# Altium PCB PCB_led7Seg_2.PcbDoc
Units mm, origin at the board's own origin, x right, y up, seen from the top; angles counter-clockwise.
Board outline 53.34 x 38.1 mm, 2 copper layers (Top Layer, Bottom Layer); 2 components, 10 nets, 20 pads, 0 vias.
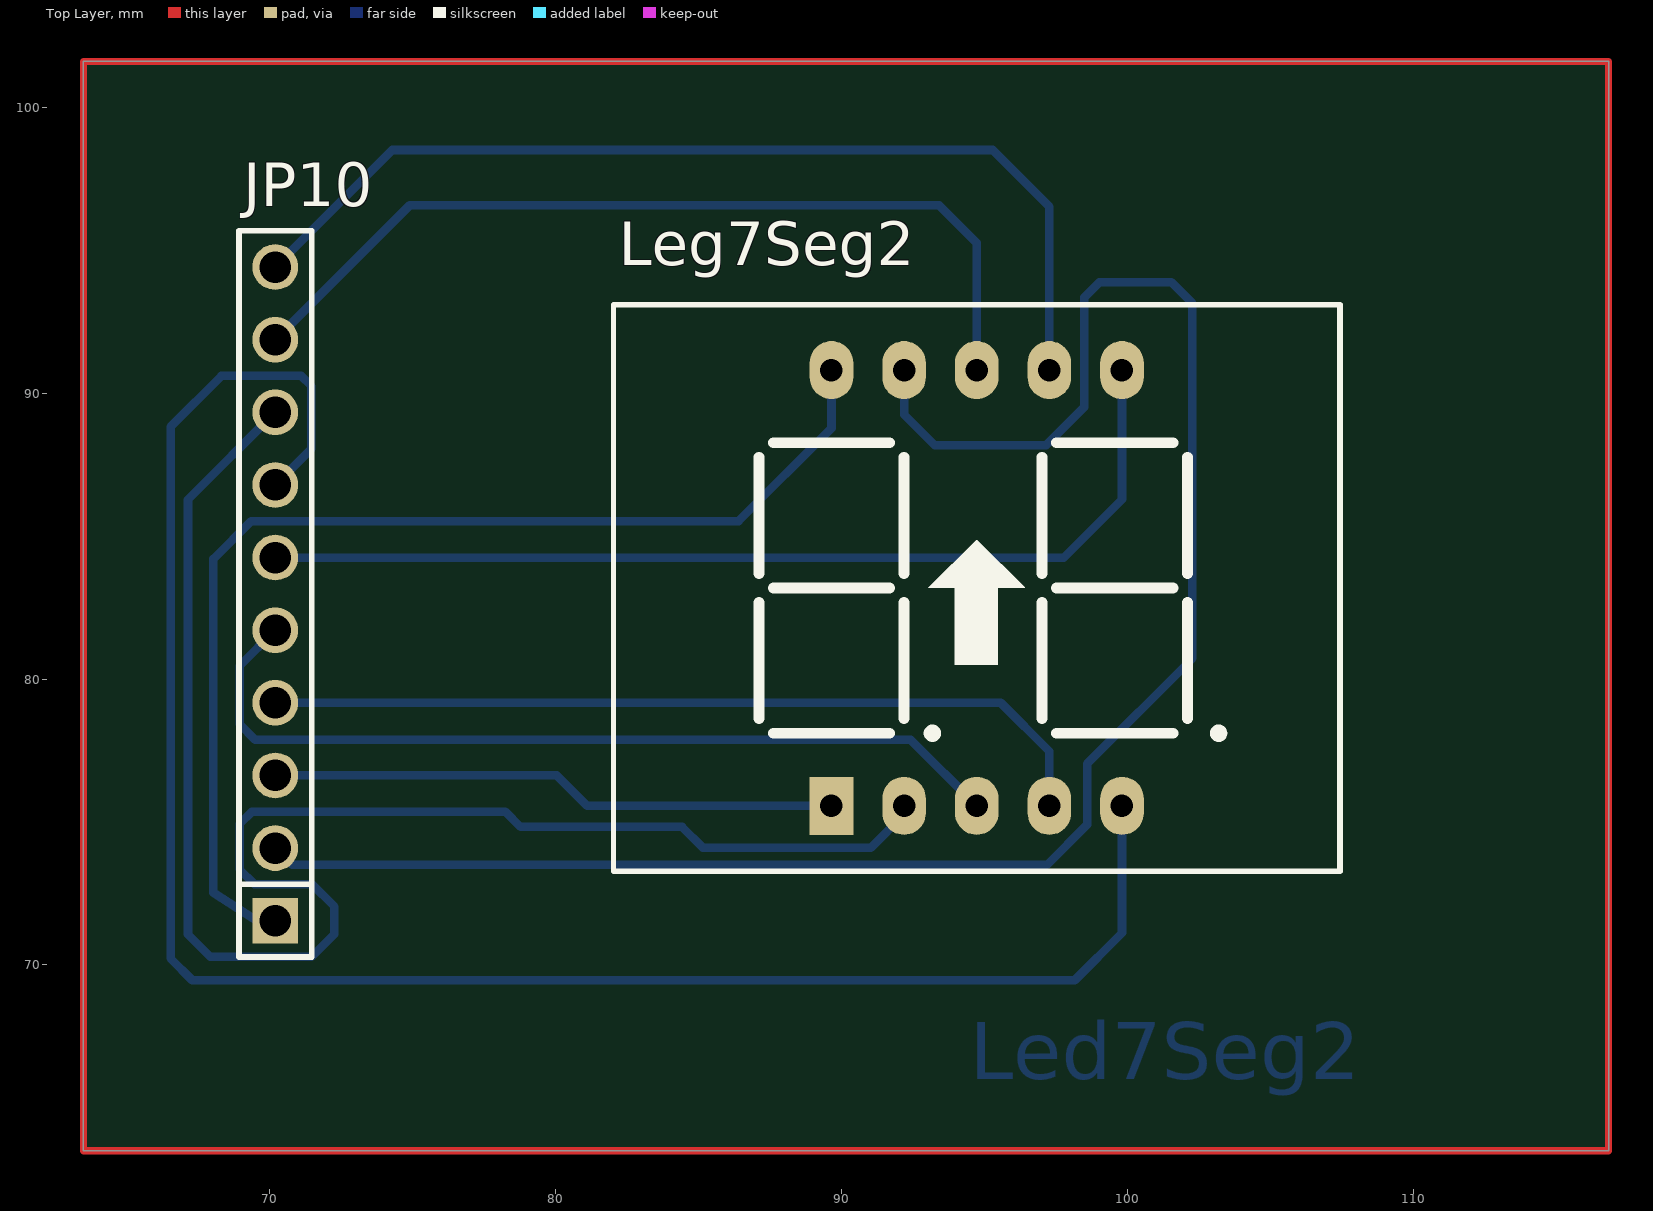
[diagram p0: Top Layer view]
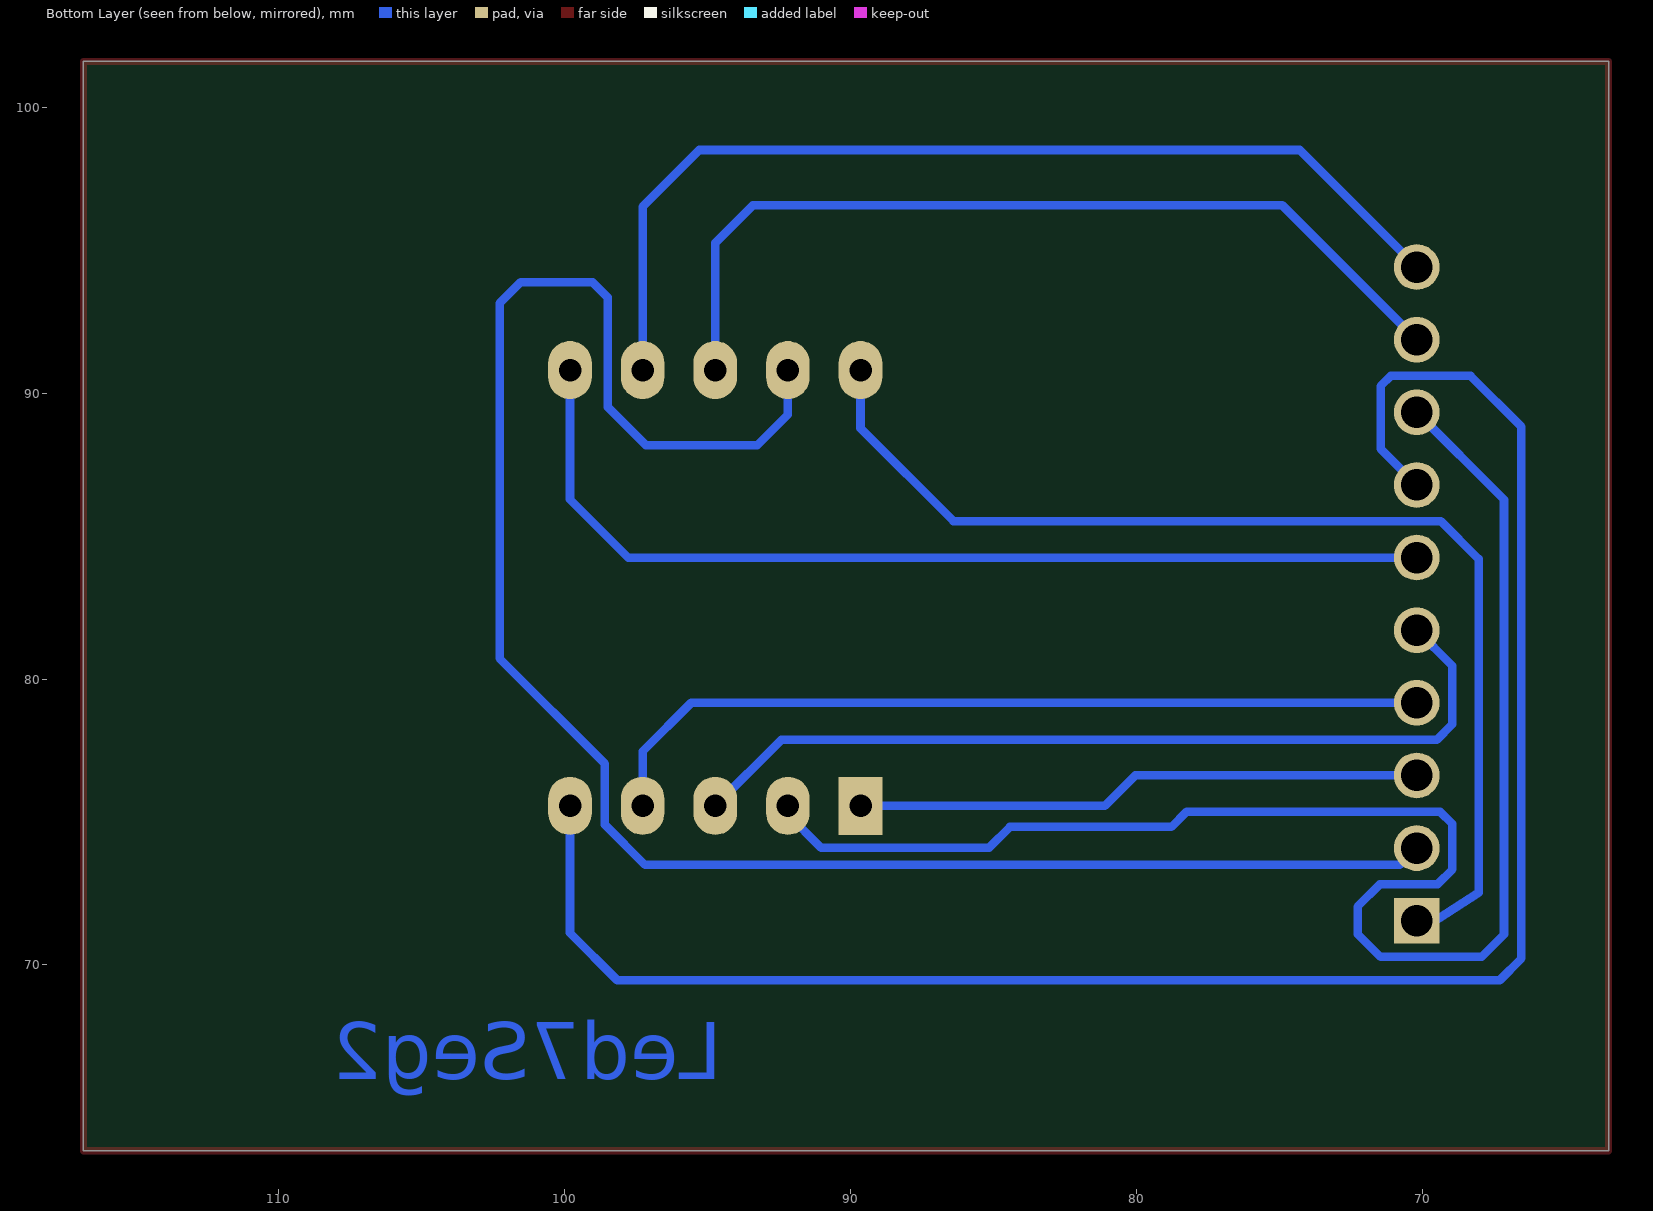
[diagram p1: Bottom Layer view, seen from below]

## Layer stack, top to bottom
Top Solder: solder mask 0.0102, Solder Resist, Dk 3.5
Top Layer: signal copper 0.0356
Dielectric 1: dielectric 0.32, FR-4, Dk 4.8
Bottom Layer: signal copper 0.0356
Bottom Solder: solder mask 0.0102, Solder Resist, Dk 3.5

## Board outline
63.5,63.5 116.84,63.5 116.84,101.6 63.5,101.6

## Design rules (kind name [scope] priority, off if disabled: settings)
Clearance [All] p1: gap=0.3
PolygonConnect [All] p1: connectstyle=Relief reliefconductorwidth=0.254 reliefentries=4 polygonreliefangle="90 Angle" airgapwidth=0.254
RoutingLayers [All] p1: top layer_v5=FALSE bottom layer_v5=TRUE
RoutingVias [All] p1: holewidth=0.711 width=1.27 viastyle="Through Hole" minholewidth=0.711 minwidth=1.27 maxholewidth=0.711 maxwidth=1.27
SolderMaskExpansion [All] p1: expansion=0.102
Width NET [All] p1: maxlimit=0.3 minlimit=0.3 preferedwidth=0.3
29 further rules are at their usual default settings.

## Components (designator, comment, footprint, x,y, rotation, side; value= is the part's Value field where it differs from the comment)
JP10 "JP 1x10 2.54" "JP 1x10 DT" 70.211,71.548 r90 top
Leg7Seg2 "LED 7 Thanh" "LED 7x2 0.56" 89.662,75.565 r0 top

## Footprints (in the part's own frame and the unit in brackets; to place one, negate y for a bottom-side part, rotate by r counter-clockwise, add the part's x,y. Pads: shape width x height; smd on the part's side, far side on the other; paste and mask are expansions set on the pad)
"JP 1x10 DT" [mm] "10 pins, 1 row, straight, gold plating"
  rect 1.6x1.6 hole 1.1: 1(0,0)
  round 1.6 hole 1.1: 2(2.54,0) 3(5.08,0) 4(7.62,0) 5(10.16,0) 6(12.7,0) 7(15.24,0) 8(17.78,0) 9(20.32,0) 10(22.86,0)
  silkscreen extent -1.27,-1.27 24.13,1.27, body extent -1.27,-1.27 24.13,1.27, height 8.54
"LED 7x2 0.56" [mil]
  rect 60x80 hole 31: 1(0,0)
  oval 60x80 hole 31: 2(100,0) 3(200,0) 4(300,0) 5(400,0) 6(400,600) 7(300,600) 8(200,600) 9(100,600) 10(0,600)
  silkscreen extent -300,-90 700,690

## Part data
JP10: library part "JP 1x10 2.54 Duc Thang", "C?m"
Leg7Seg2: library part "LED 7x2 0.56 Anot", "Dan"

## Nets (pads, with @x,y where several pads share a name; then routed paths per layer and width w, separated by ;. In a path a pad name is that pad's centre, name@x,y a point inside that pad or via, vN(x,y) a via of type N, cw(c..) or ccw(c..) an arc to the next point about the centre after c; other vN are vias at no path point)
NetJP10_1: JP10.1 Leg7Seg2.10 | length 39.7
  Bottom Layer w0.3: JP10.1 69.734,71.444 68.048,72.528 68.048,84.202 69.367,85.522 86.411,85.522 89.662,88.773 Leg7Seg2.10
NetJP10_2: JP10.2 Leg7Seg2.9 | length 66
  Bottom Layer w0.3: JP10.2 70.8,73.499 97.197,73.499 98.603,74.905 98.603,77.038 102.285,80.72 102.285,93.144 101.551,93.878 99.035,93.878 98.501,93.345 98.501,89.51 97.171,88.18 93.269,88.18 92.202,89.247 Leg7Seg2.9
NetJP10_3: JP10.3 Leg7Seg2.1 | length 19.9
  Bottom Layer w0.3: JP10.3 80.052,76.628 81.115,75.565 Leg7Seg2.1
NetJP10_4: JP10.4 Leg7Seg2.4 | length 29.7
  Bottom Layer w0.3: JP10.4 95.584,79.168 97.282,77.47 Leg7Seg2.4
NetJP10_5: JP10.5 Leg7Seg2.3 | length 30.8
  Bottom Layer w0.3: JP10.5 68.961,80.458 68.961,78.422 69.505,77.878 92.429,77.878 Leg7Seg2.3
NetJP10_6: JP10.6 Leg7Seg2.6 | length 35
  Bottom Layer w0.3: JP10.6 97.79,84.248 99.822,86.28 Leg7Seg2.6
NetJP10_7: JP10.7 Leg7Seg2.5 | length 67.1
  Bottom Layer w0.3: JP10.7 71.476,88.053 71.476,90.246 71.12,90.602 68.326,90.602 66.548,88.824 66.548,70.231 67.31,69.469 98.171,69.469 99.822,71.12 Leg7Seg2.5
NetJP10_8: JP10.8 Leg7Seg2.2 | length 56.4
  Bottom Layer w0.3: JP10.8 67.158,86.275 67.158,71.069 67.945,70.282 71.476,70.282 72.278,71.084 72.278,72.041 71.497,72.822 69.482,72.822 68.961,73.343 68.961,74.93 69.393,75.362 78.257,75.362 78.791,74.828 84.436,74.828 85.165,74.099 91.04,74.099 92.202,75.261 Leg7Seg2.2
NetJP10_9: JP10.9 Leg7Seg2.8 | length 31.5
  Bottom Layer w0.3: JP10.9 74.914,96.571 93.421,96.571 94.742,95.25 Leg7Seg2.8
NetJP10_10: JP10.10 Leg7Seg2.7 | length 35.3
  Bottom Layer w0.3: JP10.10 74.304,98.501 95.301,98.501 97.282,96.52 Leg7Seg2.7
copper on no net: | length 182.9
  Top Layer w0.254: 63.5,63.5 116.84,63.5 116.84,101.6 63.5,101.6 63.5,63.5

## Other copper
Bottom Layer:
  text "Led7Seg2" at 94.497,65.995 h2